# EAGLE board Control Board V2 RevD (EAGLE 7.4.0)
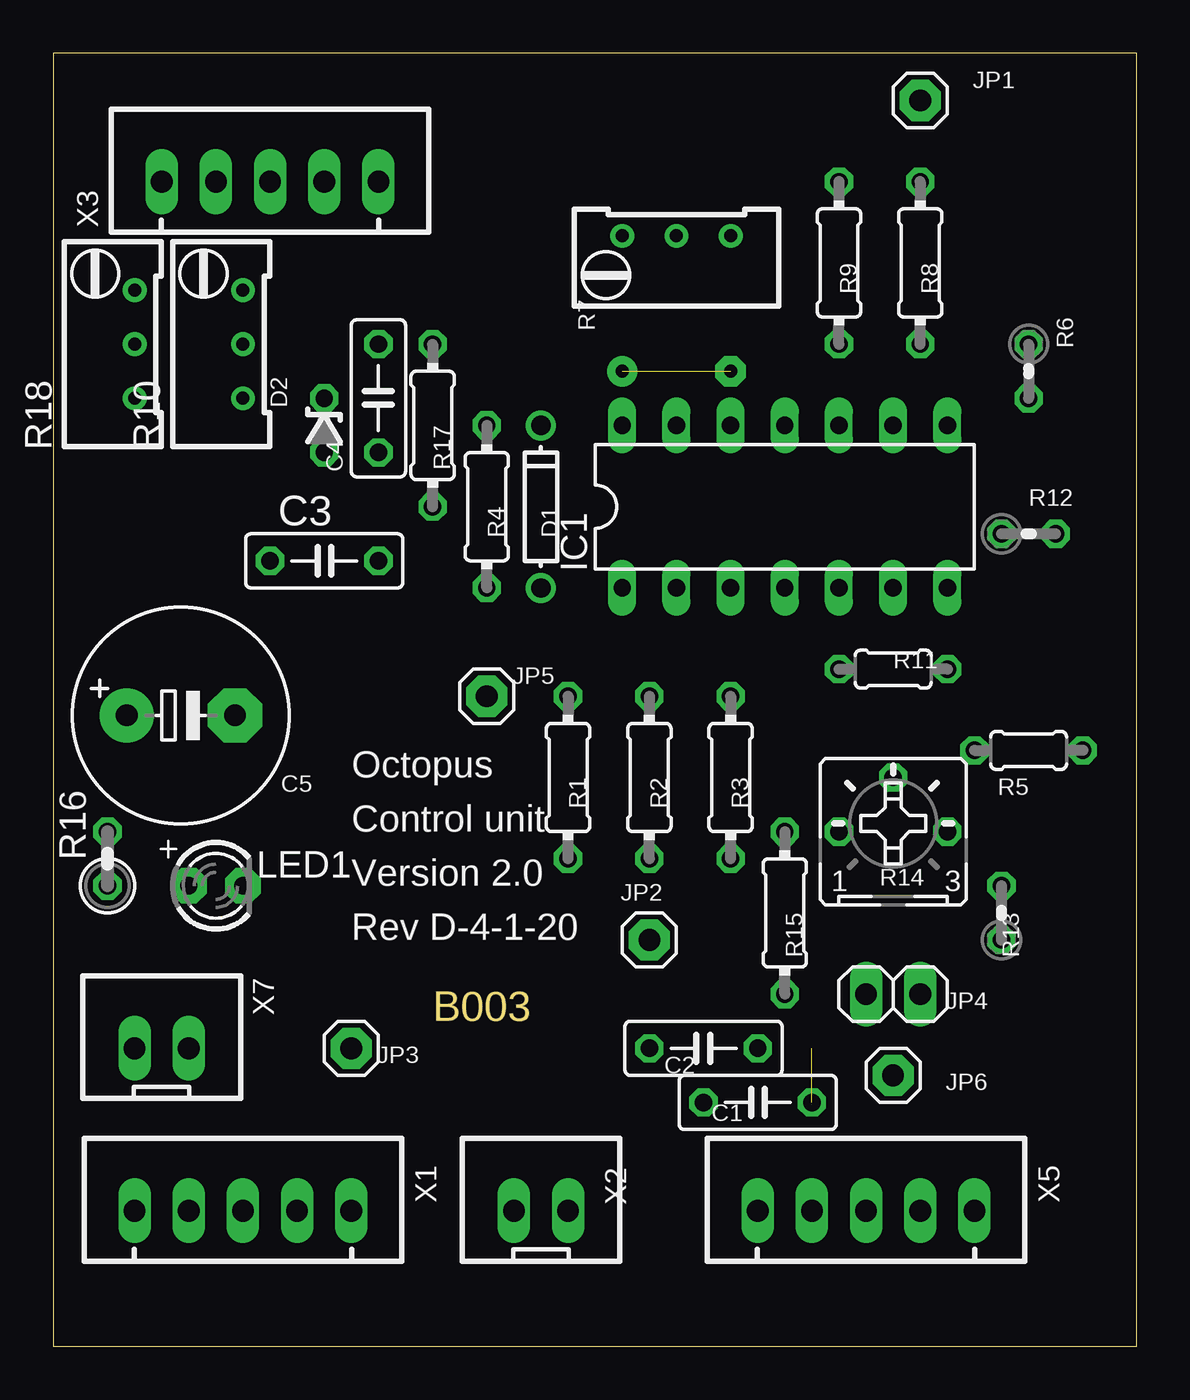
[diagram p0: board, top side]
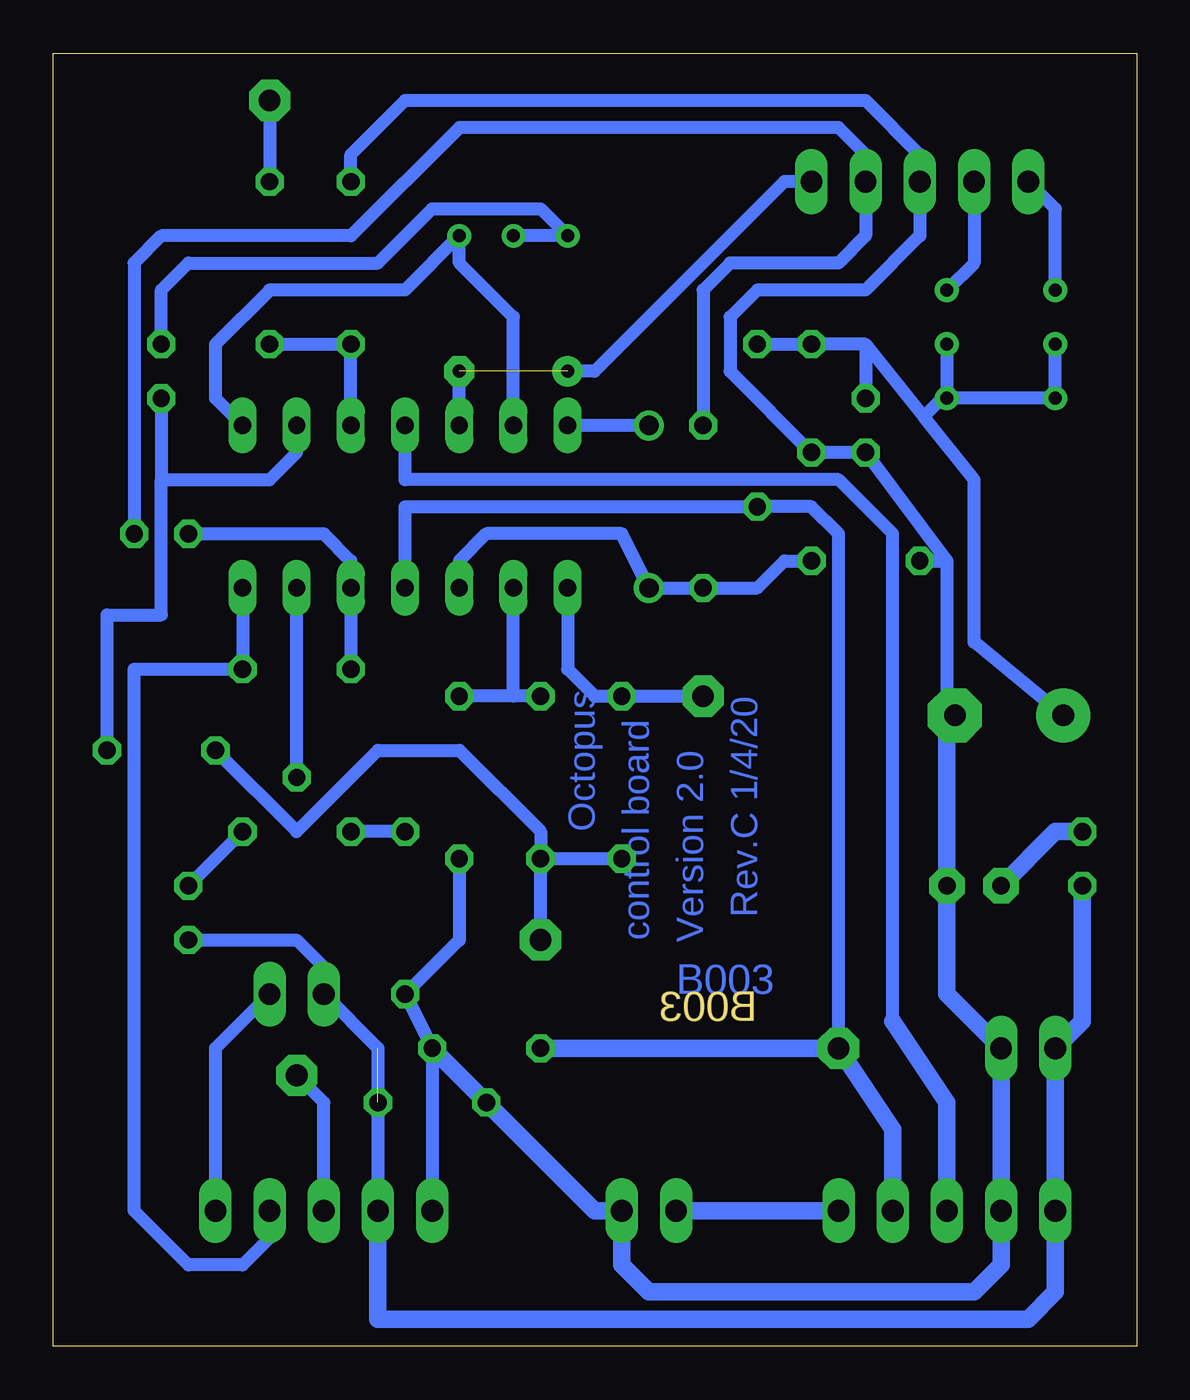
[diagram p1: board, bottom side, seen from below]

Size 50.78 x 60.63 mm. Coordinates in mm from the lower left corner, seen from the top.
Outline: 0,0 50.78,0 50.78,60.63 0,60.63 0,0
Copper layers (1*16): Top 0.035mm / dielectric 1.5mm / Bottom 0.035mm
Design rules "default": minimum track width 10mil, minimum drill 24mil, track to track 8mil, track to pad 8mil, pad to pad 8mil, via to via 8mil, smd to smd 8mil, copper to edge 40mil, drill to drill 8mil, minimum pad ring 10mil, minimum via ring 8mil, stop-mask expansion 4mil, vias tented up to drill 0mil, thermal gap 10mil

## Footprints (pad centres in the part's own frame; a part is rotated, then mirrored left to right if it is on the bottom)
C050-025X075 = drill 0.813 octagon: 1 -2.54,0; 2 2.54,0
E5-10,5 = drill 1.016 pad 2.54: + -2.54,0 | drill 1.016 pad 2.54 octagon: - 2.54,0
DO-1N4148 = drill 0.9: A -3.81,0; C 3.81,0
ZDIO-2.5 = drill 0.813 octagon: A 1.27,0; C -1.27,0
DIL14 = drill 0.813 long: 1 -7.62,-3.81; 2 -5.08,-3.81; 3 -2.54,-3.81; 4 0,-3.81; 5 2.54,-3.81; 6 5.08,-3.81; 7 7.62,-3.81; 8 7.62,3.81; 9 5.08,3.81; 10 2.54,3.81; 11 0,3.81; 12 -2.54,3.81; 13 -5.08,3.81; 14 -7.62,3.81
1X01 = drill 1.016 pad 1.93 octagon: 1 0,0
1X02 = drill 1.016 long: 1 -1.27,0; 2 1.27,0
LED3MM = drill 0.813 pad 1.676 octagon: A -1.27,0; K 1.27,0
0204/7 = drill 0.813 octagon: 1 -3.81,0; 2 3.81,0
0204/5 = drill 0.813 octagon: 1 -2.54,0; 2 2.54,0
0204V = drill 0.813 octagon: 1 -1.27,0; 2 1.27,0
RTRIM64W = drill 0.61: 1 1.27,-2.54; 2 1.27,0; 3 1.27,2.54
B25P = drill 0.813 octagon: A -2.54,0; E 2.54,0; S 0,2.54
0207/2V = drill 0.813 octagon: 1 -1.27,0; 2 1.27,0
JST-XH-05-PACKAGE-LONG-PAD = drill 1.016 long: 1 -5.08,0; 2 -2.54,0; 3 0,0; 4 2.54,0; 5 5.08,0
JST-XH-02-PACKAGE-LONG-PAD = drill 1.016 long: 1 -1.27,0; 2 1.27,0

## Placement (x,y rotation side)
C1  0.1u  [C050-025X075]  33.02,11.43 0 top
C2  1u  [C050-025X075]  30.48,13.97 180 top
C3  47n  [C050-025X075]  12.7,36.83 0 top
C4  0.1u  [C050-025X075]  15.24,44.45 90 top
C5  1u  [E5-10,5]  5.98,29.58 0 top
D1  [DO-1N4148]  22.86,39.37 90 top
D2  [ZDIO-2.5]  12.7,43.18 270 top
IC1  LM324N  [DIL14]  34.29,39.37 0 top
JP1  I_Sense\  [1X01]  40.64,58.42 0 top
JP2  V_Sense  [1X01]  27.94,19.05 0 top
JP3  V_IN  [1X01]  13.97,13.97 0 top
JP4  Out_EN  [1X02]  39.37,16.51 0 top
JP5  V_adj  [1X01]  20.32,30.48 0 top
JP6  aux  [1X01]  39.37,12.7 0 top
LED1  [LED3MM]  7.62,21.59 0 top
R1  10k  [0204/7]  24.13,26.67 270 top
R2  49k  [0204/7]  27.94,26.67 270 top
R3  10k  [0204/7]  31.75,26.67 90 top
R4  1k  [0204/7]  20.32,39.37 270 top
R5  1k  [0204/5]  45.72,27.94 180 top
R6  8k  [0204V]  45.72,45.72 270 top
R7  2k-I_trimm  [RTRIM64W]  29.21,50.8 90 top
R8  10k  [0204/7]  40.64,50.8 90 top
R9  1k  [0204/7]  36.83,50.8 270 top
R10  [RTRIM64W]  7.62,46.99 0 top
R11  [0204/5]  39.37,31.75 180 top
R12  [0204V]  45.72,38.1 0 top
R13  [0204V]  44.45,20.32 90 top
R14  1k-Hyst set  [B25P]  39.37,24.13 0 top
R15  [0204/7]  34.29,20.32 270 top
R16  330R  [0207/2V]  2.54,22.86 90 top
R17  10k  [0204/7]  17.78,43.18 270 top
R18  [RTRIM64W]  2.54,46.99 0 top
X1  Main  [JST-XH-05-PACKAGE-LONG-PAD]  8.89,6.35 0 top
X2  NTC  [JST-XH-02-PACKAGE-LONG-PAD]  22.86,6.35 0 top
X3  Potentiometers  [JST-XH-05-PACKAGE-LONG-PAD]  10.16,54.61 0 top
X5  Power  [JST-XH-05-PACKAGE-LONG-PAD]  38.1,6.35 0 top
X7  Meter PWR  [JST-XH-02-PACKAGE-LONG-PAD]  5.08,13.97 0 top

## Library data of the parts
C1-C5 R1-R13 R15 R17 R18 = rcl
D1 JP1-JP3 JP5 JP6 LED1 = adafruit
D2 = diode
IC1 = linear
JP4 = pinhead
R14 = pot
R16 = resistor
X1-X3 X5 X7 = Rembrandt Electronics - JST XH Connectors v1-0

## Nets
GND: C1.1 C2.1 C3.1 C4.1 C5.- D2.A LED1.K R3.1 R9.1 R15.2 X1.2 X2.2 X3.3 X5.1 X7.2
N$1: D1.C IC1.14
N$2: X1.5 X2.1
N$4: IC1.1 JP5.1 R1.1
N$5: JP6.1 X5.3
N$6: IC1.2 R2.1 R3.2
N$7: C3.2 D1.A IC1.3 R4.2
N$8: JP4.2 X5.5
N$9: R6.1 R7.2 R7.3
N$10: IC1.9 R5.1 R6.2
N$11: IC1.8 IC1.13 R7.1
N$12: JP1.1 R8.2
N$15: LED1.A R16.2
N$16: IC1.11 X1.3
N$17: IC1.12 X3.5
N$18: IC1.6 R14.S
N$19: R10.3 X3.2
N$20: R18.3 X3.1
N$21: JP2.1 R1.2 R2.2 R5.2
N$23: IC1.7 R11.1 X5.4
N$24: IC1.5 R11.2 R12.1
N$25: R13.2 R14.E
N$27: C4.2 C5.+ D2.C R10.1 R10.2 R17.1 R18.1 R18.2
N$28: R14.A R15.1
N$32: R4.1 R12.2 X3.4
N$34: IC1.10 R8.1 R9.2
V5_CLEAN: C1.2 JP4.1 R13.1 R16.1 X1.1 X5.2 X7.1
VCC: C2.2 IC1.4 JP3.1 R17.2 X1.4

## Tracks (layer width: path | path; a pad name or v marks a point on that pad's centre or on a via)
GND
  Bottom 0.61: X5.1 C2.1 R15.2 31.75,19.05 R3.1 | 8.89,36.83 D2.A C4.1 19.05,45.72 19.05,48.26 17.78,49.53 12.7,49.53 10.16,52.07 X3.3 10.16,55.88 12.7,58.42 34.29,58.42 36.83,55.88 R9.1 | C3.1 8.89,36.83 | 8.89,36.83 8.89,29.21 C5.-
  Bottom 0.813: 8.89,29.21 LED1.K 8.89,16.51 X7.2 X1.2 6.35,3.81 7.62,2.54 22.86,2.54 24.13,3.81 X2.2 25.4,6.35 C1.1 C2.1
N$1
  Bottom 0.61: D1.C IC1.14
N$2
  Bottom 0.813: X1.5 X2.1
N$3  (via drill 0.6 pad 1.42)
  other vias: 31.75,45.72
N$4
  Bottom 0.61: IC1.1 26.67,31.75 25.4,30.48 R1.1 JP5.1
N$5
  Bottom 0.61: X5.3 38.1,11.43 JP6.1
N$6
  Bottom 0.61: 29.21,30.48 IC1.2 | R2.1 29.21,30.48 | 29.21,30.48 R3.2
N$7
  Bottom 0.61: D1.A R4.2 | D1.A 24.13,38.1 30.48,38.1 31.75,36.83 IC1.3 | D1.A 17.78,35.56 16.51,36.83 C3.2
N$8
  Bottom 0.61: X5.5 43.18,13.97 JP4.2
N$9
  Bottom 0.61: R7.2 R7.3 27.94,53.34 33.02,53.34 35.56,50.8 44.45,50.8 45.72,49.53 R6.1
N$10
  Bottom 0.61: 45.72,40.64 40.64,40.64 39.37,41.91 IC1.9 | R6.2 45.72,40.64 | R5.1 48.26,34.29 45.72,34.29 45.72,40.64
N$11
  Bottom 0.61: IC1.13 29.21,48.26 31.75,50.8 R7.1 34.29,49.53 40.64,49.53 43.18,46.99 43.18,44.45 IC1.8
N$12
  Bottom 0.61: JP1.1 R8.2
N$15
  Bottom 0.813: LED1.A 3.81,24.13 R16.2
N$16
  Bottom 0.61: 11.43,15.24 11.43,38.1 13.97,40.64 34.29,40.64 IC1.11
  Bottom 0.813: X1.3 8.89,11.43 11.43,15.24
N$17  (via drill 0.6 pad 1.42)  (1 unrouted)
  Bottom 0.61: IC1.12 31.75,45.72 | X3.5 16.51,54.61 25.4,45.72 v26.67,45.72
N$18
  Bottom 0.61: R14.S IC1.6
N$19
  Bottom 0.61: X3.2 7.62,50.8 R10.3
N$20
  Bottom 0.61: R18.3 3.81,53.34 X3.1
N$21
  Bottom 0.61: R1.2 R2.2 | JP2.1 R2.2 | R5.2 39.37,24.13 35.56,27.94 31.75,27.94 27.94,24.13 R2.2
N$23
  Bottom 0.61: X5.4 40.64,5.08 41.91,3.81 44.45,3.81 46.99,6.35 46.99,31.75 R11.1 IC1.7
N$24
  Bottom 0.61: R11.2 IC1.5 36.83,36.83 38.1,38.1 R12.1
N$25
  Bottom 0.61: R14.E R13.2
N$27
  Bottom 0.61: 12.7,46.99 D2.C | R17.1 C4.2 12.7,46.99 | C5.+ 7.62,33.02 7.62,40.64 9.97,43.58 | 9.97,43.58 12.7,46.99 | R18.2 R18.1 R10.1 R10.2 8.89,44.67 9.97,43.58
N$28
  Bottom 0.61: R15.1 R14.A
N$32
  Bottom 0.61: R12.2 46.99,50.8 45.72,52.07 36.83,52.07 31.75,57.15 13.97,57.15 12.7,55.88 X3.4 12.7,52.07 13.97,50.8 19.05,50.8 20.32,49.53 R4.1
N$34
  Bottom 0.61: R8.1 R9.2 IC1.10
V5_CLEAN  (1 unrouted)
  Bottom 0.61: X5.2 35.56,13.97 JP4.1 38.1,17.78 39.37,19.05 R13.1
  Bottom 0.813: X5.2 35.56,1.27 5.08,1.27 3.81,2.54 X1.1 X7.1 2.54,15.24 R16.1
VCC
  Bottom 0.61: IC1.4 34.29,39.37 R17.2 15.24,39.37 13.97,38.1 JP3.1
  Bottom 0.813: X1.4 11.43,10.16 JP3.1 C2.2

## Text on the board
Bottom: Rev.C 1/4/20 | Version 2.0 | Octopus | control board | B003
Dimension: B003
tPlace: Octopus | Control unit | Version 2.0 | Rev D-4-1-20